# Altium PCB PCB3.PcbDoc
Units mil, origin at the board's own origin, x right, y up, seen from the top; angles counter-clockwise.
Board outline 2126.15 x 984.42 mil, 2 copper layers (Top Layer, Bottom Layer), stack 62.205 mil thick; 26 components, 41 nets, 164 pads, 58 vias.
Unrouted connection lines stored in the file: 4.
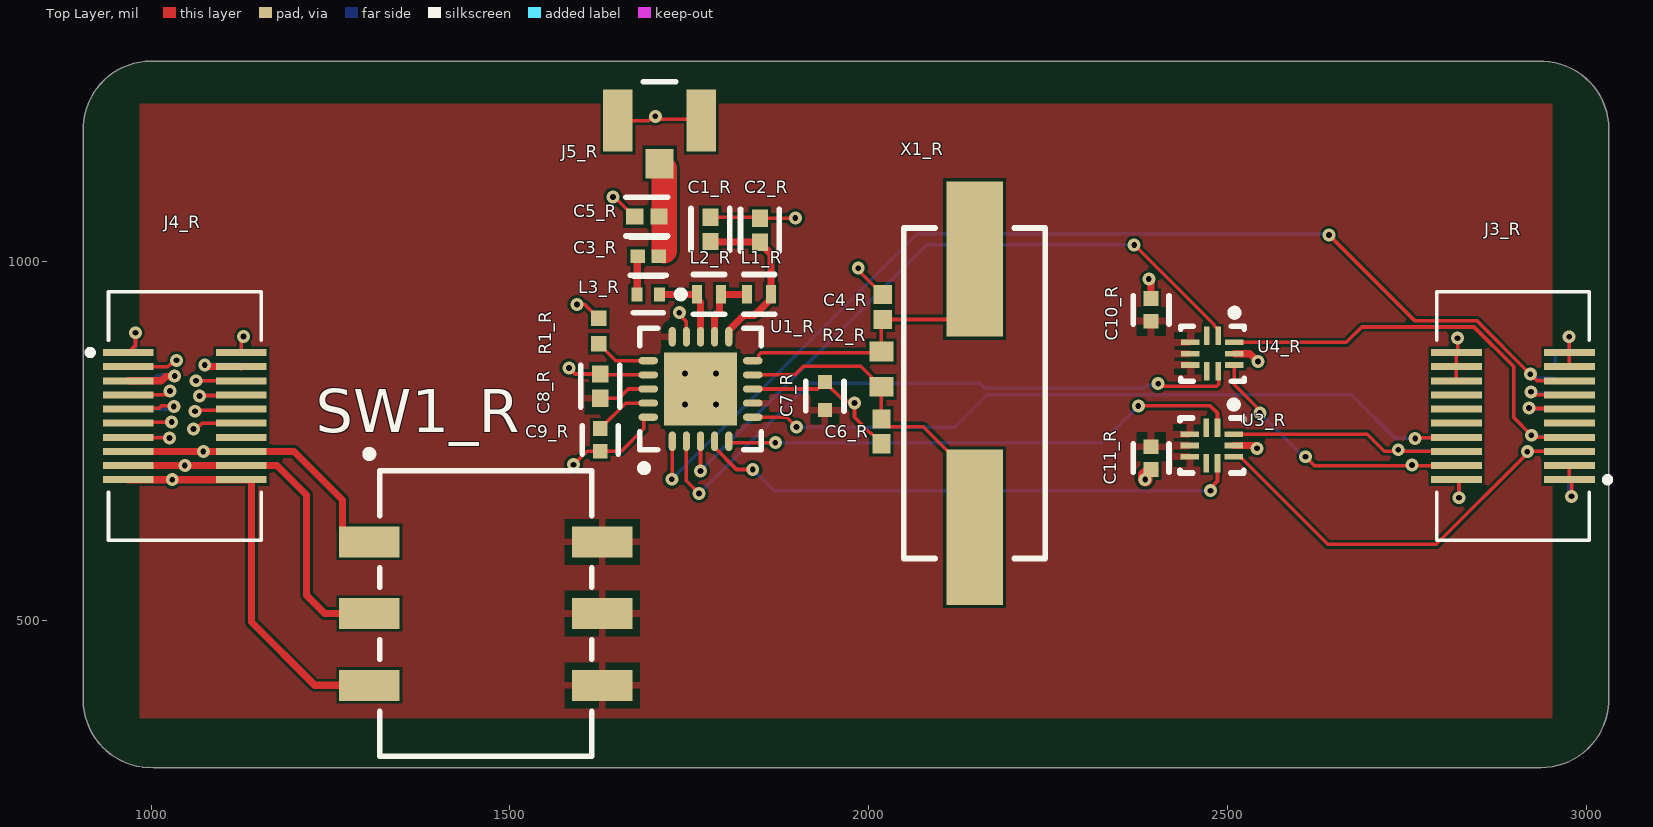
[diagram p0: Top Layer view]
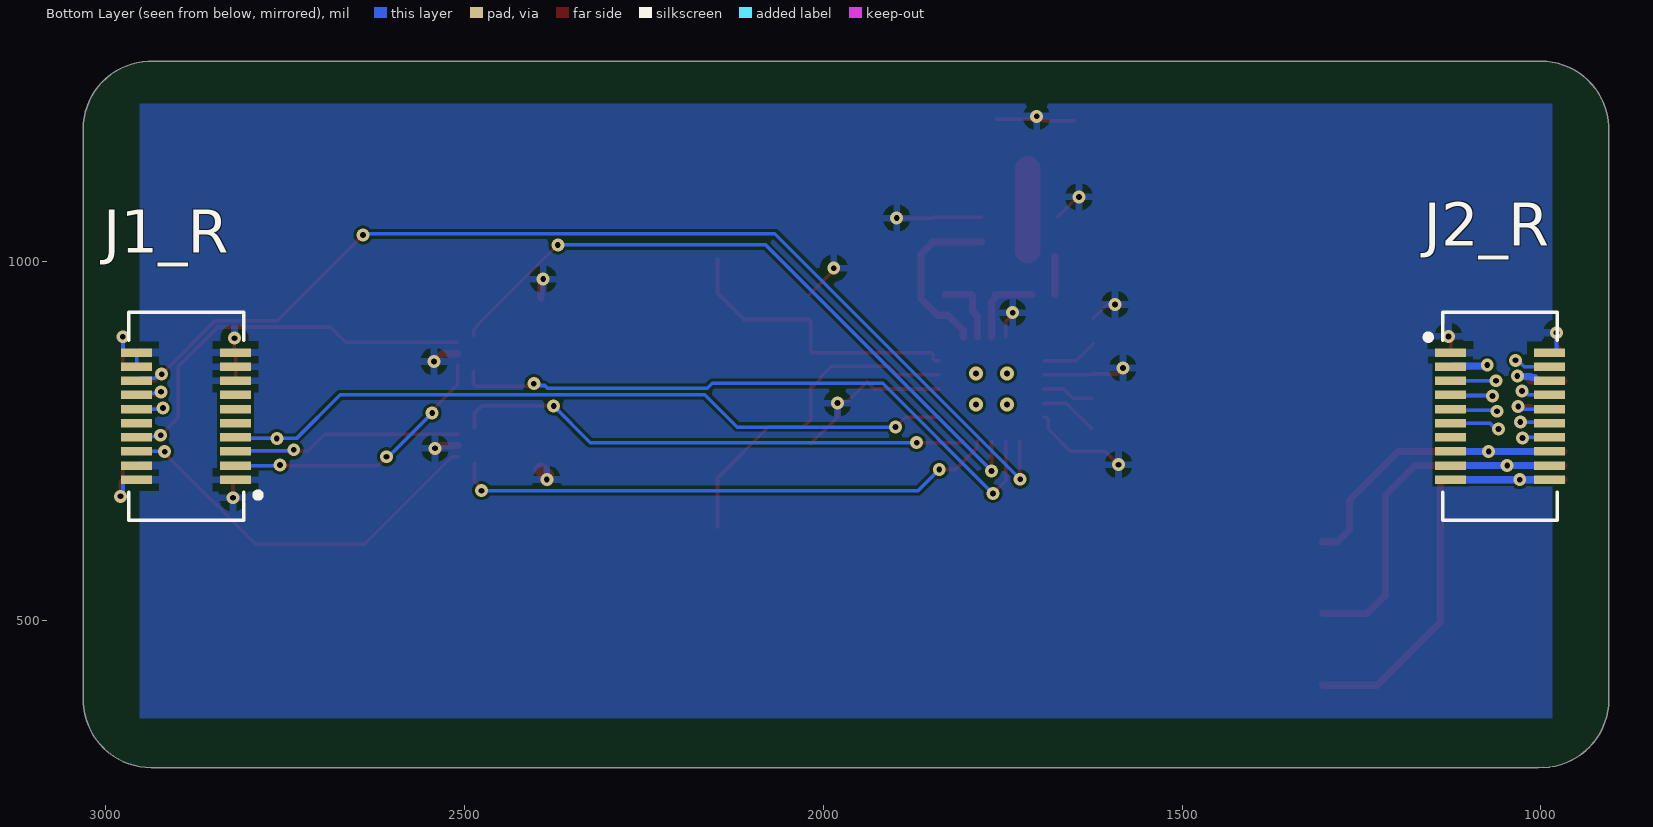
[diagram p1: Bottom Layer view, seen from below]
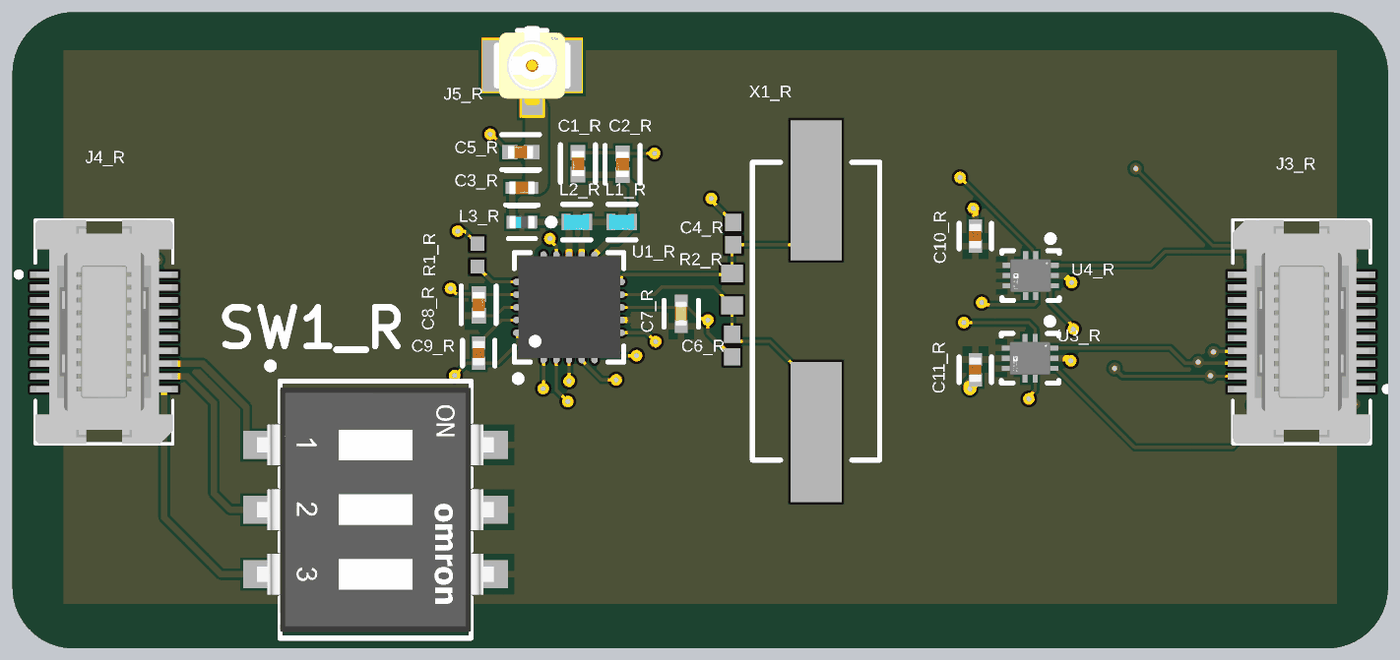
[diagram p2: 3D render of the assembled board from above, using the file's embedded part models]

## Layer stack, top to bottom
Top Solder: solder mask 0.9843, SM-004, Dk 4
Top Layer: signal copper 1.5748
Dielectric 1: prepreg 59.0551, PP-003, Dk 3.95
Bottom Layer: signal copper 1.5748
Bottom Solder: solder mask 0.9843, SM-004, Dk 4

## Board outline
905.51,389.85 905.51,1181.1 cw(c1000,1185.04) 1000,1279.61 2932.99,1279.61 2933.07,1279.53 cw(c2937.01,1185.04) 3031.58,1185.04 3031.58,393.78 3031.5,393.7 cw(c2937.01,389.76) 2937.01,295.19 1004.02,295.19 1003.94,295.28 cw(c1000,389.76)

## Design rules (kind name [scope] priority, off if disabled: settings)
Clearance [All] p1: gap=4 ignorepadtopadclearanceinfootprint=FALSE
PolygonConnect [All] p1: connectstyle=Relief reliefconductorwidth=10 reliefentries=4 polygonreliefangle="90 Angle" airgapwidth=10
RoutingVias [All] p1: holewidth=8 width=18 viastyle="Through Hole" minholewidth=8 minwidth=18 maxholewidth=28 maxwidth=50
SolderMaskExpansion [All] p1: expansion=4 istentingtop=FALSE
Width [All] p1: maxlimit=50 minlimit=4 preferedwidth=5
30 further rules are at their usual default settings.

## Components (designator, comment, footprint, x,y, rotation, side; value= is the part's Value field where it differs from the comment)
C1_R "GRM155R71H222KA01D" FP-GRM155-0_05-IPC_B 1779.53,1045.28 r270 top
C2_R "GRM155R71H472KA01D" FP-GRM155-0_05-IPC_B 1848.43,1044.15 r270 top
C3_R "GJM1555C1H1R5BB01D" FP-GJM155-0_05-IPC_C 1692.91,1007.87 r0 top
C4_R "04025A220JAT2A" CAPC1005X56X25NL10T15 2019.68,937.01 r90 top
C5_R "GJM1555C1H1R0BB01D" FP-GJM155-0_05-IPC_B 1690.94,1062.99 r180 top
C6_R "04025A220JAT2A" CAPC1005X56X25NL10T15 2017.72,763.78 r270 top
C7_R "CC0402KRX7R7BB103" FP-CC0402-MFG 1938.98,812.99 r90 top value="10 nF"
C8_R "GRM1555C1H102JA01D" FP-GRM155-0_05-IPC_B 1625.98,826.77 r90 top
C9_R "C0402C333K4RACTU" FP-C0402-BB-MFG 1625.98,751.97 r270 top value="33,000 pF"
C10_R "C0402C104K8PACTU" FP-C0402-BB-MFG 2393.7,933.07 r90 top value="0.10 μF"
C11_R "C0402C104K8PACTU" FP-C0402-BB-MFG 2393.7,726.38 r270 top value="0.10 μF"
J1_R "53916-0208" "MOLEX-  539160208" 2898,785 r90 bottom
J2_R "53916-0208" "MOLEX-  539160208" 1047,785 r270 bottom
J3_R "52991-0208" MOLEX_52991-0208 2898,785 r90 top
J4_R "52991-0208" MOLEX_52991-0208 1047,785 r270 top
J5_R "U.FL-R-SMT-1(10)" FP-U_FL-R-SMT-1_10-MFG 1708.66,1196.85 r180 top
L1_R "LQW15AN2N7C00D" FP-LQW15AN_00-W0_6-0_1-MFG 1847.44,954.72 r0 top
L2_R "LQW15AN8N2G00D" FP-LQW15AN_00-W0_6-0_1-MFG 1777.56,954.72 r0 top
L3_R "LQG15HN3N9S02D" FP-LQG15HH_02-MFG 1692.91,954.72 r180 top
R1_R "CRCW040222K0FKED" RESC1005X40X25NL05T05 1624.02,903.54 r270 top
R2_R "ERJ-3EKF1004V" RESC1608X55X30LL15T15 2017.72,850.39 r90 top
SW1_R "A6SN-3101" FP-A6SN-3101-MFG 1466.54,509.84 r270 top
U1_R "NRF24L01P-T" NRSC-QFN-20_L 1765.75,822.83 r90 top
U3_R "ADG824BCPZ-REEL7" FP-CP-10-10-MFG 2478.35,744.09 r270 top
U4_R "ADG824BCPZ-REEL7" FP-CP-10-10-MFG 2479.24,872.05 r270 top
X1_R "FOXSDLF/160-20" FOX-FOXSDLF160-20_V 2147.64,816.93 r90 top

## Footprints (in the part's own frame and the unit in brackets; to place one, negate y for a bottom-side part, rotate by r counter-clockwise, add the part's x,y. Pads: shape width x height; smd on the part's side, far side on the other; paste and mask are expansions set on the pad)
CAPC1005X56X25NL10T15 [mm] "Chip Capacitor, 2-Leads, Body 1.00x0.50mm, IPC Medium Density"
  rect 0.68x0.64 smd: 1(-0.44,0) 2(0.44,0)
  body extent -0.55,-0.3 0.55,0.3, height 0.56
FOX-FOXSDLF160-20_V [mm] "SMD, 2-Leads, Body 5x11.7mm, Height 4.5mm"
  rect 5.5x2 smd: 1(-4.75,0) 2(4.75,0)
  silkscreen extent -5.85,-2.5 5.85,2.5, body extent -5.85,-2.5 5.85,2.5, height 4.5
FP-A6SN-3101-MFG [mm]
  rect 1.1x2.15 smd paste+0 mask+0: 1(-2.54,-4.125) 2(0,-4.125) 3(2.54,-4.125) 4(2.54,4.125) 5(0,4.125) 6(-2.54,4.125)
  silkscreen extent -5.77,-4.25 5.05,3.75, body extent -5.15,-5.3 5.15,5.3, height 0.25
FP-C0402-BB-MFG [mm]
  rect 0.52x0.52 smd paste+0 mask+0: 1(-0.4,0) 2(0.4,0)
  silkscreen extent -0.5,-0.64 0.5,0.64, body extent -0.8,-0.4 0.8,0.4, height 0.25
FP-CC0402-MFG [mm]
  rect 0.5x0.5 smd paste+0 mask+0: 1(-0.5,0) 2(0.5,0)
  silkscreen extent -0.53,-0.68 0.53,0.67, body extent -0.87,-0.48 0.87,0.48, height 0.25
FP-CP-10-10-MFG [mm]
  rect 0.2x0.655 smd paste+0 mask+0: 1(-0.4,0.777) 4(-0.4,-0.777) 5(0,-0.777) 6(0.4,-0.777) 9(0.4,0.777) 10(0,0.777)
  rect 0.655x0.2 smd paste+0 mask+0: 2(-0.627,0.2) 3(-0.627,-0.2) 7(0.627,-0.2) 8(0.627,0.2)
  silkscreen extent -1.57,-1.12 0.97,1.12, body extent -1.05,-1.2 1.05,1.2, height 0.25
FP-GJM155-0_05-IPC_B [mil]
  rect 24.23x22.54 smd paste+0 mask+0: 1(-16.87,0) 2(16.87,0)
  silkscreen extent -29,-27 29,27, body extent -35,-17 35,17, height 10
FP-GJM155-0_05-IPC_C [mil]
  rect 20.29x18.6 smd paste+0 mask+0: 1(-14.9,0) 2(14.9,0)
  silkscreen extent -25,-27 25,27, body extent -29,-15 29,15, height 10
FP-GRM155-0_05-IPC_B [mil]
  rect 24.23x22.54 smd paste+0 mask+0: 1(-16.87,0) 2(16.87,0)
  silkscreen extent -29,-27 29,27, body extent -35,-17 35,17, height 10
FP-LQG15HH_02-MFG [mm]
  rect 0.4x0.5 smd paste+0 mask+0: 1(-0.4,0) 2(0.4,0)
  silkscreen extent -1.28,-0.64 0.53,0.65, body extent -0.7,-0.38 0.7,0.38, height 0.25
FP-LQW15AN_00-W0_6-0_1-MFG [mm]
  rect 0.35x0.65 smd paste+0 mask+0: 1(-0.425,0) 2(0.425,0)
  silkscreen extent -0.55,-0.7 0.55,0.7, body extent -0.7,-0.45 0.7,0.45, height 0.25
FP-U_FL-R-SMT-1_10-MFG [mm]
  rect 1x1.05 smd paste-1000 mask+0: 1(0,1.525)
  rect 1.05x2.2 smd paste-1000 mask+0: 2(-1.475,0) 3(1.475,0)
  silkscreen extent -0.58,-1.38 0.58,-1.38, body extent -2.1,-1.48 2.1,2.15, height 0.25
"MOLEX-  539160208" [mm]
  rect 0.3x1.1 smd: 1(-2.25,1.5) 2(-2.25,-2) 3(-1.75,1.5) 4(-1.75,-2) 5(-1.25,1.5) 6(-1.25,-2) 7(-0.75,1.5) 8(-0.75,-2) 9(-0.25,1.5) 10(-0.25,-2) 11(0.25,1.5) 12(0.25,-2) 13(0.75,1.5) 14(0.75,-2) 15(1.25,1.5) 16(1.25,-2) 17(1.75,1.5) 18(1.75,-2) 19(2.25,1.5) 20(2.25,-2)
  silkscreen extent -3.68,-2.89 3.68,1.78, body extent -3.65,-2.3 3.65,1.8, height 3.46
MOLEX_52991-0208 [mm]
  rect 0.25x1.8 smd: 1(-2.25,-2) 2(-2.25,2) 3(-1.75,-2) 4(-1.75,2) 5(-1.25,-2) 6(-1.25,2) 7(-0.75,-2) 8(-0.75,2) 9(-0.25,-2) 10(-0.25,2) 11(0.25,-2) 12(0.25,2) 13(0.75,-2) 14(0.75,2) 15(1.25,-2) 16(1.25,2) 17(1.75,-2) 18(1.75,2) 19(2.25,-2) 20(2.25,2)
  silkscreen extent -4.4,-3.45 4.4,2.7, body extent -4.4,-2.7 4.4,2.7, height 2.28
NRSC-QFN-20_L [mm] "QFN, 20-Leads, Body 4x4mm, Pitch 0.5mm, Thermal Pad 2.6x2.6mm, IPC High Density"
  oval 0.7x0.25 smd: 1(-1.85,1) 2(-1.85,0.5) 3(-1.85,0) 4(-1.85,-0.5) 5(-1.85,-1) 11(1.85,-1) 12(1.85,-0.5) 13(1.85,0) 14(1.85,0.5) 15(1.85,1)
  oval 0.25x0.7 smd: 6(-1,-1.85) 7(-0.5,-1.85) 8(0,-1.85) 9(0.5,-1.85) 10(1,-1.85) 16(1,1.85) 17(0.5,1.85) 18(0,1.85) 19(-0.5,1.85) 20(-1,1.85)
  rect 2.6x2.6 smd: 21(0,0)
  silkscreen extent -2.92,-2.15 2.15,2.15, body extent -2,-2 2,2, height 0.95
RESC1005X40X25NL05T05 [mm] "Chip Resistor, 2-Leads, Body 1.00x0.50mm, IPC Medium Density"
  rect 0.55x0.55 smd: 1(-0.45,0) 2(0.45,0)
  body extent -0.53,-0.27 0.53,0.28, height 0.4
RESC1608X55X30LL15T15 [mm] "Chip Resistor, 2-Leads, Body 1.60x0.80mm, IPC High Density"
  rect 0.7x0.85 smd: 1(-0.625,0) 2(0.625,0)
  body extent -0.87,-0.48 0.87,0.48, height 0.55

## Part data
C1_R: library part CMP-2008-04653-5, "Chip Multilayer Ceramic Capacitors for General Purpose, 0402, 2200pF, X7R, 15%, 10%, 50V", Capacitance=2.2nF, Case Code (Imperial)=0402, Case Code (Metric)=1005, Dielectric=X7R, Max Operating Temperature=125°C, Min Operating Temperature=-55°C, Package Quantity=1, Tolerance=10%, Voltage=50V, Case/Package=0402, Depth=0.5mm, Height=0.5mm, Lead Free="Lead Free", Length=1mm, Material=Ceramic, Mount="Surface Mount", Number of Pins=2, Packaging="Tape and Reel", Radiation Hardening=No, REACH SVHC="No SVHC", Termination=SMD/SMT, Thickness=0.022inch, Voltage Rating=50V, Voltage Rating (DC)=50V, Weight=2.3E-05oz, Width=0.5mm
C2_R: library part CMP-2008-04663-5, "Chip Multilayer Ceramic Capacitors for General Purpose, 0402, 4700pF, X7R, 15%, 10%, 50V", Capacitance=4.7nF, Case Code (Imperial)=0402, Case Code (Metric)=1005, Dielectric=X7R, Max Operating Temperature=125°C, Min Operating Temperature=-55°C, Package Quantity=1, Tolerance=10%, Voltage=50V, Case/Package=0402, Depth=0.5mm, Height=0.5mm, Lead Free="Lead Free", Length=1mm, Material=Ceramic, Mount="Surface Mount", Packaging="Tape and Reel", Radiation Hardening=No, REACH SVHC="No SVHC", Termination=SMD/SMT, Thickness=0.022inch, Voltage Rating=50V, Voltage Rating (DC)=50V, Width=0.02inch
C3_R: library part CMP-2008-03820-2, "Multi-Layer Ceramic Capacitor 1.5pF C0G  ±0.1pF 0402 Paper T/R", Capacitance=1.5pF, Case Code (Imperial)=0402, Case Code (Metric)=1005, Dielectric=C0G, Max Operating Temperature=125°C, Min Operating Temperature=-55°C, Package Quantity=10000, Temperature Coefficient=30ppm/°C, Voltage=50V, Case/Package=0402, Construction=Flat, Depth=0.5mm, Height=0.5mm, Lead Free="Lead Free", Lead Pitch=0.3mm, Length=1mm, Mount="Surface Mount", Number of Pins=2, Packaging="Tape and Reel", Radiation Hardening=No, REACH SVHC="No SVHC", Series=GJM, Termination=SMD/SMT, Thickness=0.022inch, Voltage Rating=50V, Voltage Rating (DC)=50V, Width=0.5mm
C4_R C6_R: library part CMP-2008-02613-1, Capacitance=22pF, Manufacturer="AVX Interconnect / Elco", Part Number=04025A220JAT2A
C5_R: library part CMP-2008-03808-2, "Multi-Layer Ceramic Capacitor 1pF C0G  ±0.1pF 0402 Paper T/R", Capacitance=1pF, Case Code (Imperial)=0402, Case Code (Metric)=1005, Dielectric=C0G, Max Operating Temperature=125°C, Min Operating Temperature=-55°C, Package Quantity=10000, Temperature Coefficient=30ppm/°C, Voltage=50V, Case/Package=0402, Depth=0.5mm, Height=0.5mm, Lead Free="Lead Free", Lead Pitch=0.3mm, Length=1mm, Mount="Surface Mount", Number of Pins=2, Packaging="Tape and Reel", Radiation Hardening=No, REACH SVHC="No SVHC", Termination=SMD/SMT, Thickness=0.022inch, Voltage Rating=50V, Voltage Rating (DC)=50V, Width=0.02inch
C7_R: library part CMP-03422-000501-1, "CAP CER 10000PF 16V X7R 0402", Capacitance="10 nF", Manufacturer=YAGEO, Package=CC0402, Temperature="-55°C to +125°C", Temperature Characteristic=X7R, Temperature Coefficient=30ppm/°C, Temperature Range High=+125°C, Temperature Range Low=-55°C, Tolerance=0.1, Voltage Rating="16 V", Automotive=No, Automotive Grade=NA, Category=Cap, ComponentLink2Description=Datasheet, ComponentLink2URL=http://www.yageo.com/documents/recent/UPY-GP_NP0_16V-to-50V_16.pdf, Device Class L1="Passive Components", Device Class L2=Capacitors, Device Class L3="Ceramic Capacitors", Digikey Description="CAP CER 10000PF 16V X7R 0402", Footprint Url=http://www.yageo.com/exep/pages/download/literatures/UPY-C_GEN_24.pdf, Height=0.55mm, Ipc Land Pattern Name=CAPC10050X50, Lead Free=Yes, Manufacturer Part Number=CC0402KRX7R7BB103, Material=Ceramic, Mouser Description="0402 10 nF 16 V ±10 % Tolerance X7R SMT Multilayer Ceramic Capacitor", Octopart=https://octopart.com/cc0402krx7r7bb103-yageo-192895, RoHS=TRUE
C8_R: library part CMP-2008-04254-2, "Chip Multilayer Ceramic Capacitors for General Purpose, 0402, 1000pF, C0G, 30ppm/°C, 5%, 50V", Capacitance=1nF, Case Code (Imperial)=0402, Case Code (Metric)=1005, Dielectric=C0G, Dielectric Material=Ceramic, Insulation Resistance=10GR, Max Operating Temperature=125°C, Min Operating Temperature=-55°C, Package Quantity=1, Temperature Coefficient=30ppm/°C, Tolerance=5%, Voltage=50V, Case/Package=0402, Depth=0.5mm, Height=0.5mm, Lead Free="Lead Free", Length=1mm, Material=Ceramic, Mount="Surface Mount", Number of Pins=2, Packaging="Tape and Reel", Radiation Hardening=No, REACH SVHC="No SVHC", Termination=SMD/SMT, Thickness=0.022inch, Voltage Rating=50V, Voltage Rating (DC)=50V, Width=0.5mm
C9_R: library part CMP-2008-03182-2, "0402 C 33nF Ceramic Multilayer Capacitor; 16 V; +125degC; X7R Dielectric; +/-10%", Capacitance=33nF, Manufacturer=Kemet, Package=C0402-BB, Temperature="-55°C to +125°C", Temperature Characteristic=X7R, Temperature Coefficient=15%, Temperature Range High=+125°C, Temperature Range Low=-55°C, Tolerance=0.1, Voltage Rating="16 V", Automotive=No, Category=Cap, ComponentLink2Description=Datasheet, ComponentLink2URL=https://content.kemet.com/datasheets/KEM_C1002_X7R_SMD.pdf, Device Class L1="Passive Components", Device Class L2=Capacitors, Device Class L3="Ceramic Capacitors", Digikey Description="0402 C 33nF Ceramic Multilayer Capacitor; 16 V; +125degC; X7R Dielectric; +/-10%", Height=0.55mm, Ipc Land Pattern Name=CAPC10050X50, Lead Free=Yes, Manufacturer Part Number=C0402C333K4RACTU, Material=Ceramic, Mouser Description="0402 C 33nF Ceramic Multilayer Capacitor; 16 V; +125degC; X7R Dielectric; +/-10%", Octopart=https://octopart.com/c0402c333k4ractu-kemet-128815, RoHS=TRUE
C10_R C11_R: library part CMP-2008-02046-2, "CAP CER 0.1UF 10V X5R 0402", Capacitance="0.10 μF", Manufacturer=Kemet, Package=C0402-BB, Temperature="-55°C to +125°C", Temperature Characteristic=X5R, Temperature Coefficient=15%, Temperature Range High=+125°C, Temperature Range Low=-55°C, Tolerance=0.1, Voltage Rating="10 V", Automotive=No, Category=Cap, ComponentLink2Description=Datasheet, ComponentLink2URL=https://content.kemet.com/datasheets/KEM_C1002_X7R_SMD.pdf, Device Class L1="Passive Components", Device Class L2=Capacitors, Device Class L3="Ceramic Capacitors", Digikey Description="CAP CER 0.1UF 10V X5R 0402", Height=0.55mm, Ipc Land Pattern Name=CAPC10050X50, Lead Free=Yes, Manufacturer Part Number=C0402C104K8PACTU, Material=Ceramic, Mouser Description="Capacitor 100 nF 10 VDC 0402", Octopart=https://octopart.com/c0402c104k8pactu-kemet-140039, RoHS=TRUE
J3_R J4_R: "20 Position Connector Receptacle, Center Strip Contacts Surface Mount Gold", Package=None, Availability=Unavailable, MF=Molex, MP=52991-0208, Price=None, SnapEDA_Link=https://www.snapeda.com/parts/52991-0208/Molex/view-part/230631/?ref=snap
J5_R: library part CMP-2000-05152-3, "CONN U.FL RCPT STR 50 OHM SMD", Dielectric Material=Polymer, Frequency=6GHz, Housing Color=Beige, Insulation Resistance=500MR, Max Operating Temperature=90°C, Min Operating Temperature=-40°C, Package Quantity=2500, Body Material=Bronze, Body Plating=Silver, Connector Type=Coaxial, Contact Material=Brass, Contact Plating=Gold, Depth=3.1mm, Fastening Type=Snap, Gender=Male, Impedance=50R, Lead Free="Lead Free", Length=3mm, Max Frequency=6GHz, Mount="Surface Mount", Orientation=Straight, Packaging="Cut Tape", Radiation Hardening=No, REACH SVHC="No SVHC", Series=U.FL, Termination=Solder, Weight=0.001764oz, Wire/Cable Type=Coaxial
L1_R: library part CMP-06042-001756-1, "Wire Wound RF Inductor 2.7nH ±0.2nH 850mA 0.05Ω 0402 (1005)", Case Code (Imperial)=0402, Case Code (Metric)=1005, Current=750mA, Current Rating=850mA, DC Resistance (DCR)=50mR, Inductance=2.7nH, Max Operating Temperature=125°C, Min Operating Temperature=-55°C, Package Quantity=10000, Resistor Type=Wirewound, Self Resonant Frequency=15GHz, Test Frequency=100MHz, Case/Package=0402, Core Material=Air, DC Current=850mA, Depth=0.7mm, Height=0.5mm, Height - Seated (Max)=0.024inch, Lead Free="Lead Free", Length=1mm, Max DC Current=850mA, Military Standard=Not, Mount="Surface Mount", Number of Pins=2, Packaging="Tape and Reel", Q Factor=20, Radiation Hardening=No, REACH SVHC="No SVHC", Shielding=Unshielded, Termination=SMD/SMT, Weight=2.8E-05oz, Width=0.02inch
L2_R: library part CMP-2000-06598-2, "Wire Wound RF Inductor 8.2nH ±2% 540mA 0.14Ω 0402 (1005)", Case Code (Imperial)=0402, Case Code (Metric)=1005, Current Rating=540mA, DC Resistance (DCR)=140mR, Inductance=8.2nH, Inductance Tolerance=2%, Max Operating Temperature=125°C, Min Operating Temperature=-55°C, Package Quantity=10000, Self Resonant Frequency=5.5GHz, Test Frequency=100MHz, Case/Package=0402, Core Material=Air, DC Current=540mA, Depth=0.7mm, Height=0.5mm, Lead Free="Lead Free", Length=1mm, Max DC Current=540mA, Military Standard=Not, Mount="Surface Mount", Number of Pins=2, Packaging="Tape and Reel", Q Factor=25, Radiation Hardening=No, REACH SVHC="No SVHC", Shielding=Unshielded, Termination=SMD/SMT, Tolerance=2%, Weight=2.8E-05oz, Width=0.02inch
L3_R: library part CMP-06042-004719-1, "Multilayer type RF Inductor 3.9nH ±0.3nH 0.13Ω 700mA 0402", Case Code (Imperial)=0402, Case Code (Metric)=1005, Current Rating=300mA, DC Resistance (DCR)=190mR, Inductance=3.9nH, Max Operating Temperature=125°C, Min Operating Temperature=-55°C, Package Quantity=10000, Self Resonant Frequency=6GHz, Test Frequency=100MHz, Case/Package=0402, Core Material=Air, DC Current=300mA, Depth=0.55mm, Height=0.02inch, Height - Seated (Max)=0.022inch, Lead Free="Lead Free", Length=1mm, Max DC Current=300mA, Military Standard=Not, Mount="Surface Mount", Number of Pins=2, Packaging="Tape and Reel", Q Factor=8, Radiation Hardening=No, REACH SVHC="No SVHC", Shielding=Unshielded, Termination=SMD/SMT, Width=0.02inch
R1_R: library part CMP-1011-00659-2, Manufacturer="Vishay Dale", Resistance=22k, Part Number=CRCW040222K0FKED
R2_R: library part CMP-1012-00849-2, Manufacturer=Panasonic, Resistance=1M, Part Number=ERJ-3EKF1004V
SW1_R: library part CMP-08827-000007-1, "SWITCH SLIDE DIP SPST 25MA 24V", Ambient Temperature Range High=+85°C, Ambient Temperature Range Low=-30°C, Contact Resistance=200mΩ, Current Rating=25mA, Manufacturer="Omron Electronics Inc-EMC Div", Temperature="-30°C to +85°C", Voltage Rating Dc=24V, Automotive=No, Category=Switch, ComponentLink2Description=Datasheet, ComponentLink2URL=https://omronfs.omron.com/en_US/ecb/products/pdf/en-a6sn.pdf, Device Class L1=Electromechanical, Device Class L2=Switches, Device Class L3="DIP Switches", Digikey Description="SWITCH SLIDE DIP SPST 25MA 24V", Electromechanical Life=1000Cycles, Height=4.55mm, Lead Free=Yes, Manufacturer Part Number=A6SN-3101, Mouser Description="DIP Switches / SIP Switches 3P Knife-Edge, 2.3mm Slide SMT Flat-Act", Number Of Circuits=3, Octopart=https://octopart.com/a6sn-3101-omron-55396000, Package=A6SN-3101, RoHS=TRUE, Standoff Height=0.7mm, Temperature Range High=+85°C, Temperature Range Low=-30°C, Throw Configuration=SPST
U1_R: library part CMP-2000-06859-1, "Single Chip Transceiver, 2.4 GHz, 60 mW, 1.9 to 3.6 V, -40 to 85 degC, 20-Pin QFN, RoHS, Tray", Current - Receiving=12.6mA~13.5mA, Current - Transmitting=7mA~11.3mA, Frequency=2.4GHz, Manufacturer="Nordic Semiconductor", Operating Temperature=-40°C~85°C, Package / Case=20-VFQFNExposedPad, Package Description="20-Pin Quad Flat No-lead Package, Body 4 x 4 mm, Pitch 0.5 mm", Package Reference=QFN20, Power - Output=0dBm, Standard Package=490, Voltage - Supply=1.9V~3.6V, Category=RF/IFandRFID, Data Rate (Max)=2Mbps, Datasheet URL=http://www.nordicsemi.com/eng/content/download/2726/34069/file/nRF24L01P_Product_Specification_1_0.pdf, Datasheet Version="Rev. 1.0, 09/2008", Design Resources=DevelopmentToolSelector, Family=RFTransceiverICs, For Use With=1490-1002-ND-KITEVALUATIONNRF24L01P1568-1295-ND-SPARKFUNTRANSCEIVERBREAKOUT-1568-1296-ND-SPARKFUNTRANSCEIVERBREAKOUT-1471-1410-ND-DEVBOARDNRFSCLICKNRF24L01P-MODULE-PCB-ND-KITEVALNRF24L01+PCBANTENNANRF24L01P-MODULE-SMA-ND-KITEVALNRF24L01+SMACONNNRF24L01P-UPGRADE-ND-UPGRADE2PCB/1SMANRF24L01103990038-ND-DEVDUINOSENSORNODEV1.3103990053-ND-DEVDUINOSENSORNODEV2(ATMEGA103990074-ND-DEVDUINOSENSORNODE106990026-ND-ENERGYMONITORSHIELDV2113990088-ND-WIRELESSGATESHIELD113990095-ND-DEVDUINOSENSORNODEV3(ATMEGA106030001-ND-ENERGYMONITORSHIELD1597-1361-ND-DEVDUINOSENSORNODEV2.2(ATMEG105990030-ND-RGBWSTRIPWIRELESSSHIELDV1.0, GPIO=-, Manufacturer URL=http://www.nordicsemi.com/eng/Products/, Memory Size=-, Modulation=GFSK, Mounting Technology=SurfaceMount, Online Catalog=nRF24L01+, Other Names=1490-1019, Packaging=Tray, Protocol=-, RF Family/Standard=GeneralISM>1GHZ, Sensitivity=-94dBm, Serial Interfaces=SPI, Series=-, Type=TxRxOnly
U3_R U4_R: library part CMP-09113-000012-1, "IC SWITCH DUAL SPDT 10LFCSP", Manufacturer="Analog Devices", Max Supply Voltage=3.6V, Min Supply Voltage=1.65V, Nominal Supply Current=0.003uA, On State Resistance=0.5Ω, Package=CP-10-10, Temperature="-40°C to +85°C", Temperature Range High=+85°C, Temperature Range Low=-40°C, -3Db Bandwith=90MHz, Automotive=No, Category=IC, ComponentLink2Description=Datasheet, ComponentLink2URL=https://www.analog.com/media/en/technical-documentation/data-sheets/ADG824.pdf, Device Class L1="Integrated Circuits (ICs)", Device Class L2="Interface ICs", Device Class L3="Analog Switches", Digikey Description="IC SWITCH DUAL SPDT 10LFCSP", Footprint Url=https://www.analog.com/media/en/symbols-footprints/symbols/ADG824BCPZ-REEL7.bxl, Height=0.6mm, Interface=LVCMOS, Lead Free=Yes, Manufacturer Part Number=ADG824BCPZ-REEL7, Mux Demux Ratio=1:2, Number Of Circuits=2, Octopart=https://octopart.com/adg824bcpz-reel7-analog+devices-12410880, RoHS=TRUE, Standoff Height=0.02mm, Throw Configuration=SPDT
X1_R: library part CMP-1749-00001-1, "Resistance Weld SMD Crystal, 16 MHz, +/- 30 ppm, 20 pF, -20 to 70 degC, 2-Pin SMD, RoHS, Tape and Reel", Case\Package=SOT-553-6, Max Operating Temperature="150 degC", Max Supply Voltage="3.3 V", Max Supply Voltage (DC)="6 V", Min Operating Temperature="-55 degC", Min Supply Voltage="1.4 V", Min Supply Voltage (DC)="4 V", Output Current="3 mA", Package Quantity=1, ComponentLink1Description="Manufacturer URL", ComponentLink1URL=http://www.foxonline.com/, ComponentLink2Description=Datasheet, ComponentLink2URL=http://foxonline.com/pdfs/hc49sdlf.pdf, DatasheetVersion=Mar-15, Height="0.55 mm", Interface=I2C, Length="1.6 mm", Mount="Surface Mount", PackageDescription="2-Pin Surface Mount Device, Body 5 x 11.7 mm, Height 4.5 mm", PackageReference=FOX-FOXSDLF160-20, Packaging="Cut Tape", Pins=6, Radiation Hardening=No, REACH SVHC="No SVHC", RoHSCompliant=true, Weight="9.9E-05 oz", Width="1.2 mm"

## Via types
v1: diameter 18, hole 8, Top Layer to Bottom Layer, 54 vias
v2: diameter 19.68, hole 7.87, Top Layer to Bottom Layer, 4 vias

## Nets (pads, with @x,y where several pads share a name; then routed paths per layer and width w, separated by ;. In a path a pad name is that pad's centre, name@x,y a point inside that pad or via, vN(x,y) a via of type N, cw(c..) or ccw(c..) an arc to the next point about the centre after c; other vN are vias at no path point)
AIN6: J2_R.8 J4_R.8 | length 118
  Top Layer w5: v1(1067.41,812.9) 1068.22,813.71 1124.92,813.71 J4_R.8
  Bottom Layer w5: v1(1067.41,812.9) 1068.22,813.71 1124.92,813.71 J2_R.8
AIN7: J2_R.9 J4_R.9 | length 111.4
  Top Layer w5: J4_R.9 969.51,796.09 1011.19,796.09 1014.32,799.21 1031.5,799.21 1031.66,799.05 v1(1031.66,798.56)
  Bottom Layer w5: J2_R.9 1027.13,794.84 1031.25,798.97 v1(1031.66,798.56)
GND: C1_R.1 C2_R.1 C4_R.2 C5_R.2 C6_R.2 C7_R.2 C8_R.2 C9_R.2 C10_R.2 C11_R.2 J1_R.1 J1_R.2 J1_R.3 J1_R.16 J1_R.17 J1_R.18 J1_R.19 J1_R.20 J2_R.1 J2_R.2 J3_R.1 J3_R.2 J3_R.3 J3_R.16 J3_R.17 J3_R.18 J3_R.19 J3_R.20 J4_R.1 J4_R.2 J5_R.2 J5_R.3 R1_R.1 U1_R.8 U1_R.14 U1_R.17 U1_R.20 U3_R.10 U4_R.10 | length 1367.3
  Top Layer w5: J4_R.1 978.21,883.54 v1(978.21,901.17) ; J4_R.2 1125.74,893.04 v1(1128.83,896.13) ; v1(1582.56,851.97) 1590.88,843.64 C8_R.2 1627.11,842.52 U1_R.17 ; v1(1588.77,717.35) 1607.65,736.22 C9_R.2 1655.51,736.22 1686.56,767.26 1686.56,781.23 1688.79,783.46 U1_R.20 ; v1(1593.66,940.69) 1604.59,940.69 R1_R.1 ; v1(1643.7,1090.55) 1645.67,1090.55 1673.23,1062.99 C5_R.2 ; J5_R.3 1693.33,1196.85 1699.24,1202.76 v1(1702.76,1202.76) 1706.69,1198.82 J5_R.2@1758.86,1198.82 ; v1(1736.22,929.13) 1736.22,926.79 1746.06,916.95 U1_R.14 ; C1_R.1 1847.3,1062.15 C2_R.1 v1(1897.85,1060.99) v1(1897.85,1060.99) ; U1_R.8 1929.13,822.83 C7_R.2 1966.02,805.64 1977.83,805.64 v1(1980.32,803.15) 1980.32,783.33 2002.43,761.22 2003.74,761.22 2017.72,747.24 C6_R.2 ; v1(1985.55,991.18) 1985.55,988.46 C4_R.2 ; J3_R.2 2820.41,696.42 2822.83,694 v1(2822.83,671.26) ; J3_R.16 J3_R.18 J3_R.20 2820.87,875.19 v1(2820.87,893.7) ; v1(2976.38,895.67) 2976.74,895.31 J3_R.19 J3_R.17 ; J3_R.3 J3_R.1 2979.71,693.45 v1(2979.71,673.17)
  Top Layer w10: v1(2390.55,975.98) 2393.7,972.83 C10_R.2 ; U3_R.10 2537.4,744.09 v1(2541.34,740.16) ; U4_R.10 2531.67,872.05 v1(2542.61,861.11)
  Top Layer w20: v1(2385.43,696.6) 2385.43,702.35 C11_R.2
  Bottom Layer w5: v1(978.21,901.17) 978.21,876.99 981.62,873.58 J2_R.1 ; J1_R.1 2972.8,696.42 2976.21,693.01 2976.21,680.2 2979.71,676.69 v1(2979.71,673.17) ; J1_R.17 J1_R.19 2972.8,873.58 2976.21,876.99 2976.21,895.5 v1(2976.38,895.67)
I2C0_SCL: J1_R.12 J3_R.12
I2C0_SDA: J1_R.13 J3_R.13 | length 91
  Top Layer w5: v1(2923.23,818.9) 2926.75,818.9 2931.12,814.53 J3_R.13
  Bottom Layer w5: v1(2923.23,818.9) 2925.41,816.71 2954.87,816.71 J1_R.13
I2C1_SCL: J2_R.10 J4_R.10 | length 131.8
  Top Layer w5: v1(1061.12,791.81) 1062.63,793.33 1124.23,793.33 J4_R.10
  Bottom Layer w5: v1(1061.12,791.81) 1062.63,793.33 1124.23,793.33 J2_R.10
I2C1_SDA: J2_R.11 J4_R.11 | length 102.6
  Top Layer w5: J4_R.11 969.46,776.36 1028.33,776.36 v1(1028.72,776.75)
  Bottom Layer w5: J2_R.11 989.15,776.36 1028.33,776.36 v1(1028.72,776.75)
I2S_CLKEXT: J2_R.3 J4_R.3 | length 122
  Top Layer w5: J4_R.3 1023.23,853.9 1026.5,857.17 1028.43,857.17 1033.97,862.71 v1(1035.44,862.71)
  Bottom Layer w5: J2_R.3 1023.11,853.9 1031.92,862.71 v1(1035.44,862.71)
I2S_SCK: J1_R.10 J3_R.10
I2S_SDI: J1_R.14 J3_R.14
I2S_SDO: J1_R.15 J3_R.15 U1_R.1 | length 1569.3
  Top Layer w5: v1(1725.82,697.07) 1726.38,697.63 U1_R.1 ; v1(2641.73,1037.4) 2760.93,918.2 2847.59,918.2 v1(2922.26,843.52) 2931.14,834.65 2933.07,834.65 2933.5,834.21 J3_R.15
  Bottom Layer w5: v1(1725.82,697.07) 2067.87,1039.12 2640.01,1039.12 v1(2641.73,1037.4) ; v1(2922.26,843.52) 2925.78,843.52 2931.69,837.62 2953.65,837.62 J1_R.15
I2S_WS: J1_R.11 J3_R.11 | length 94.3
  Top Layer w5: v1(2920.38,796.37) 2921.14,795.61 2975.98,795.61 J3_R.11
  Bottom Layer w5: v1(2920.38,796.37) 2921.91,794.84 J1_R.11
MISO: U1_R.5 U3_R.2 | length 727.8
  Top Layer w5: U1_R.5 1807.09,748.03 v1(1870.08,748.03) ; v1(2375.98,799.21) 2476.38,799.21 2486.22,789.37 U3_R.2
  Bottom Layer w5: v1(1870.08,748.03) 2324.8,748.03 v1(2375.98,799.21)
MOSI: U1_R.4 U3_R.8 | length 767
  Top Layer w5: U1_R.4 1785.43,741.14 1815.94,710.63 v1(1838.58,710.63) ; v1(2476.38,681.1) 2476.38,684.62 2486.22,694.46 U3_R.8
  Bottom Layer w5: v1(1838.58,710.63) 1868.11,681.1 v1(2476.38,681.1)
NetC3_R_1: C3_R.1 L3_R.2 | length 53.5
  Top Layer w10: L3_R.2 1677.59,955.15 1677.59,1007.45 C3_R.1
NetC3_R_2: C3_R.2 C5_R.1 J5_R.1 | length 115
  Top Layer w35: C3_R.2@1715.19,1015.24 J5_R.1@1715.19,1130.29
NetC4_R_1: C4_R.1 R2_R.2 U1_R.10 X1_R.2 | length 424
  Top Layer w5: U1_R.10 1844.56,862.2 1846.8,864.44 1846.8,870.42 1849.86,873.48 2016.2,873.48 R2_R.2 2017.72,917.72 C4_R.1 2110.77,919.68 2147.64,956.56 X1_R.2
NetC6_R_1: C6_R.1 R2_R.1 U1_R.9 X1_R.1 | length 475.6
  Top Layer w5: U1_R.9 1897.34,842.52 1909.16,854.33 1989.17,854.33 2003.48,840.02 2003.48,837.07 2014.76,825.79 R2_R.1 C6_R.1 2017.72,780.31 2027.82,770.22 2076.24,770.22 2147.64,698.82 X1_R.1
NetC9_R_1: C9_R.1 U1_R.19 | length 81.6
  Top Layer w5: C9_R.1 1661.42,803.15 U1_R.19
NetL1_R_1: L1_R.1 L2_R.2 U1_R.12 | length 99.1
  Top Layer w10: U1_R.12 1785.43,924.45 1792.4,931.42 1792.4,952.83 L2_R.2 L1_R.1
NetL2_R_1: L2_R.1 L3_R.1 U1_R.13 | length 113.3
  Top Layer w10: L3_R.1 L2_R.1 1760.83,948.82 1765.75,943.9 U1_R.13
NetR1_R_2: R1_R.2 U1_R.16 | length 78.7
  Top Layer w5: R1_R.2 1647.64,862.2 U1_R.16
PDOWN: J2_R.12 J4_R.12 | length 139.7
  Top Layer w5: v1(1059.24,767.03) 1062.76,767.03 1070.88,775.16 J4_R.12
  Bottom Layer w5: v1(1059.24,767.03) 1062.76,767.03 1070.88,775.16 J2_R.12
QSPI0_MISO: J1_R.6 J3_R.6 U3_R.1 | length 405.1
  Top Layer w5: U3_R.1 2694.88,759.84 2718.5,736.22 v1@2740.16,736.22 ; v1(2738.19,738.19) v1@2740.16,736.22 ; J3_R.6 2818.83,736.22 v1@2740.16,736.22
  Bottom Layer w5: v1(2738.19,738.19) 2739.39,736.99 2818.06,736.99 J1_R.6
QSPI0_MOSI: J1_R.5 J3_R.5 U3_R.9 | length 608.9
  Top Layer w5: U3_R.9 2517.91,728.35 2639.95,606.3 2791.34,606.3 v1@2919.28,734.25 ; v1@2920.83,735.79 J3_R.5
  Bottom Layer w5: v1(2918.05,735.48) 2918.36,735.79 J1_R.5
QSPI0_SCK: J1_R.7 J3_R.7 U4_R.1 | length 615.6
  Top Layer w5: U4_R.1 2665.88,887.8 2687.28,909.2 2843.86,909.2 2898.98,854.08 2898.98,783.09 v1(2923.71,758.35) 2926.59,755.47 J3_R.7
  Bottom Layer w5: v1(2923.71,758.35) 2925.15,756.91 2955.61,756.91 J1_R.7
QSPI0_SDIO2: J1_R.8 J3_R.8 U1_R.6 | length 1088.9
  Top Layer w5: U1_R.6 1885.83,783.46 v1(1899.61,769.69) ; v1(2761.81,753.94) 2762.58,754.7 2818.49,754.7 J3_R.8
  Bottom Layer w5: v1(1899.61,769.69) 2120.25,769.69 2165.28,814.71 2673.48,814.71 2734.25,753.94 v1(2761.81,753.94) 2817.72,753.94 J1_R.8
QSPI0_SDIO3: J1_R.9 J3_R.9
QSPI0_SS0: J1_R.4 J3_R.4 U4_R.9 | length 448.3
  Top Layer w5: U4_R.9 2509.84,828.74 2545.28,793.31 v1(2545.28,789.37) ; v1(2608.98,728.42) 2621.29,716.1 J3_R.4
  Bottom Layer w5: v1(2545.28,789.37) 2606.23,728.42 v1(2608.98,728.42) ; v1(2757.22,716.89) 2758.01,716.1 J1_R.4
SCK: U1_R.3 U4_R.2 | length 951.6
  Top Layer w5: v1(1765.75,708.66) U1_R.3 ; v1@2370.29,1023.84 2481.8,912.33 2481.8,911.01 2487.11,905.7 U4_R.2
  Bottom Layer w5: v1(1765.75,708.66) 2080.71,1023.62 v1(2370.08,1023.62)
SQWOUT: J2_R.13 J4_R.13 | length 96.3
  Top Layer w5: J4_R.13 968.77,754.96 1025.31,754.96 v1(1025.82,754.44)
  Bottom Layer w5: J2_R.13 1024.8,755.47 v1(1025.82,754.44)
SS: U1_R.2 U4_R.8 | length 894.4
  Top Layer w5: U1_R.2 1746.06,694.88 v1(1763.78,677.17) ; v1(2403.54,830.21) 2407.06,830.21 2410.44,826.84 2485.26,826.84 2488.19,829.76 2488.19,846.27 U4_R.8
  Bottom Layer w5: v1(1763.78,677.17) 1917.32,830.71 2154.74,830.71 2161.73,823.71 2384.54,823.71 2388.56,827.73 2401.06,827.73 v1(2403.54,830.21)
UART0_CTS: J2_R.5 J4_R.5 | length 115.5
  Top Layer w10: J4_R.5 1014.6,834.21 1020.53,840.14 1031.39,840.14 1032.47,841.22 v1(1032.82,840.87)
  Bottom Layer w10: J2_R.5 1003.69,834.21 1008.47,838.99 1013.33,838.99 1014.47,840.14 1031.39,840.14 1032.47,841.22 v1(1032.82,840.87)
UART0_RTS: J2_R.4 J4_R.4 | length 103.9
  Top Layer w10: v1(1074.8,856.3) 1076.97,856.3 1079.29,853.98 1125.66,853.98 J4_R.4
  Bottom Layer w10: v1(1074.8,856.3) 1076.3,854.8 1124.83,854.8 J2_R.4
UART0_RX: J2_R.7 J4_R.7 | length 103.7
  Top Layer w5: J4_R.7 1022.96,814.53 1026.97,818.54 1026.48,819.03 1026.48,819.88 v1(1026.24,819.88)
  Bottom Layer w5: J2_R.7 1017.1,814.53 1023.2,820.63 1026.24,820.63 v1(1026.24,819.88)
UART0_TX: J2_R.6 J4_R.6 | length 126.7
  Top Layer w5: v1(1062.45,834.33) 1062.56,834.21 J4_R.6
  Bottom Layer w5: v1(1062.45,834.33) 1062.51,834.27 1125.68,834.27 J2_R.6
VCC: C7_R.1 C8_R.1 C10_R.1 C11_R.1 SW1_R.4 SW1_R.5 SW1_R.6 U1_R.7 U1_R.15 U1_R.18 U3_R.4 U3_R.5 U3_R.6 U4_R.4 U4_R.5 U4_R.6 | length 72.3
  Top Layer w5: C8_R.1 1652.28,809.9 1665.22,822.83 U1_R.18
VCC_1: J2_R.15 J2_R.16 J4_R.15 J4_R.16 SW1_R.1 | length 550.3
  Top Layer w10: J4_R.15 v1(1072.83,735.79) J4_R.16 1199.25,735.79 1266.81,668.23 1266.81,626.5 1283.46,609.84 SW1_R.1
  Bottom Layer w10: J2_R.15 v1(1072.83,735.79) J2_R.16
VCC_2: J2_R.17 J2_R.18 J4_R.17 J4_R.18 SW1_R.2 | length 641
  Top Layer w10: J4_R.17 v1(1047,716.1) 1175.63,716.1 1216.54,675.2 1216.54,535.43 1242.13,509.84 SW1_R.2
  Bottom Layer w10: J2_R.17 v1(1047,716.1) J2_R.18
VCC_3: J2_R.19 J2_R.20 J4_R.19 J4_R.20 SW1_R.3 | length 708.6
  Top Layer w10: J4_R.19 v1(1029.53,696.42) J4_R.20 1139.8,696.42 1139.88,696.34 1139.88,497.91 1227.95,409.84 SW1_R.3
  Bottom Layer w10: J2_R.19 v1(1029.53,696.42) J2_R.20
VDD_PA: C1_R.2 C2_R.2 L1_R.2 U1_R.11 | length 240.5
  Top Layer w10: C1_R.2 1780.09,1027.84 1847.86,1027.84 C2_R.2 1848.43,1026.43 1864.17,1010.69 L1_R.2 1864.17,948.82 1841.04,925.69 1826.44,925.69 1805.12,904.37 U1_R.11
pads on no net: J2_R.14 J4_R.14 U1_R.21 U3_R.3 U3_R.7 U4_R.3 U4_R.7
copper on no net:
  other v2: 1744.09,801.18 1787.4,801.18 1744.09,844.49 1787.4,844.49

## Polygon pours and split planes (outlines as drawn)
GND on Bottom Layer "GND_L02_P000" (solid, pour order 0): 984.25,1220.47 984.25,364.17 2952.76,364.17 2952.76,1220.47
VCC on Top Layer "VCC_L01_P001" (solid, pour order 1): 2952.76,1220.47 2952.76,364.17 984.25,364.17 984.25,1220.47

## Silkscreen, mask and mechanical layers (free items; w line width, h text height)
Mechanical 1:
  lines w1: 905.43,389.76 ccw(c1000,389.76) 1003.94,295.28 ; 905.51,389.85 905.51,1181.1 cw(c1000,1185.04) 1000,1279.61 2932.99,1279.61 ; 1004.02,295.19 2937.01,295.19 ccw(c2937.01,389.76) 3031.5,393.7 ; 2933.07,1279.53 cw(c2937.01,1185.04) 3031.58,1185.04 3031.58,393.78